# Altium PCB eggubator.PcbDoc (part 2 of 2)
Units mil, origin at the board's own origin, x right, y up, seen from the top; angles counter-clockwise.
Board outline 5983.25 x 3976.38 mil, 2 copper layers (Top Layer, Bottom Layer); 80 components, 96 nets, 327 pads, 68 vias.
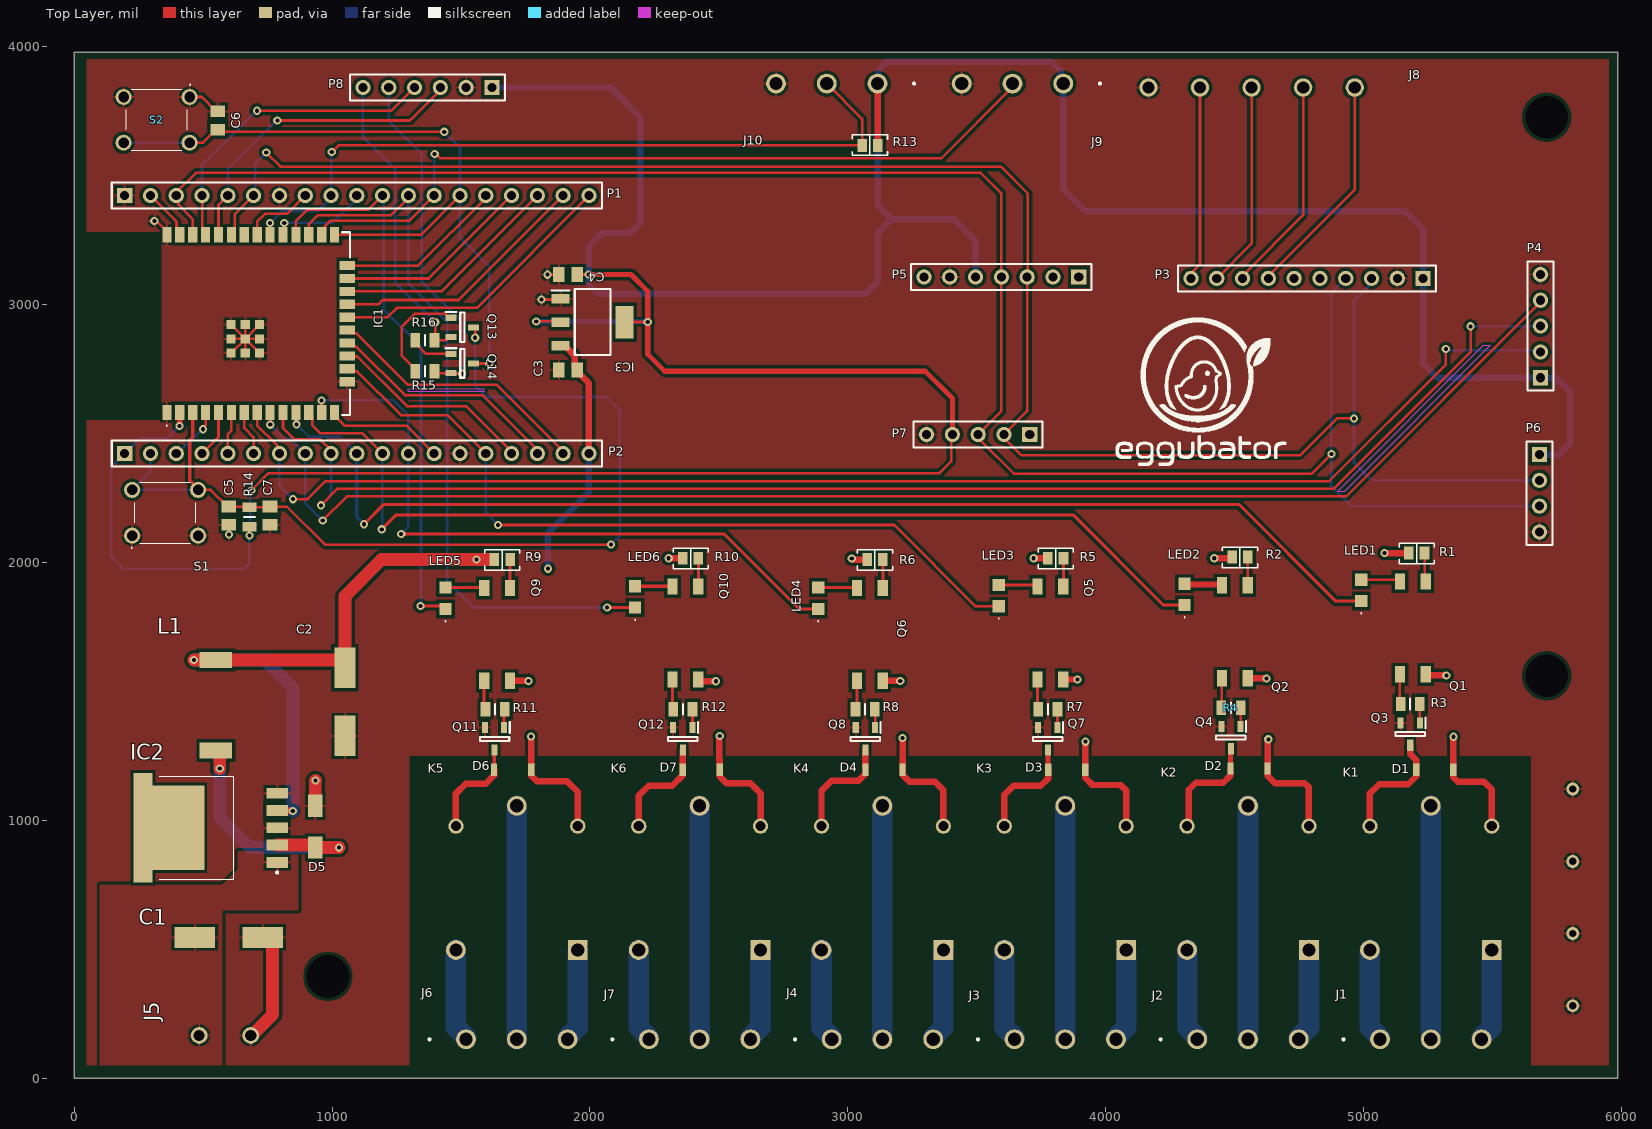
[diagram p0: Top Layer view]

## Part data (continued)
R14 R15 R16: library part RC0805FR-0710KL, "Res General Purpose Thick Film 0805 10k Ohm 1% 1/8W ±100ppm/°C Ceramic Paper T/R", Case Code (Imperial)=0805, Manufacturer="Yageo Group", Max Operating Temperature=155°C, Max Power Dissipation=125mW, Min Operating Temperature=-55°C, Mouser Part Number=603-RC0805FR-0710KL, Temperature Coefficient=100ppm/°C, Tolerance=1%, Voltage Rating=150V, Arrow Part Number=RC0805FR-0710KL, Arrow Price/Stock=https://www.arrow.com/en/products/rc0805fr0710kl/yageo.html?utm_currency=USD&region=europe, Case/Package=0805, Category="Chip SMD Resistors", China RoHS=Non-Compliant, ComponentLink1Description=https://datasheet.octopart.com:443/RC0805FR-0710KL-Yageo-datasheet-175887523.pdf?src-supplier=Newark, ComponentLink1URL=https://datasheet.octopart.com:443/RC0805FR-0710KL-Yageo-datasheet-175887523.pdf?src-supplier=Newark, ComponentLink2Description=https://datasheet.octopart.com:443/RC0805FR-0710KL-Yageo-datasheet-62067350.pdf?src-supplier=Farnell, ComponentLink2URL=https://datasheet.octopart.com:443/RC0805FR-0710KL-Yageo-datasheet-62067350.pdf?src-supplier=Farnell, ComponentLink3Description=https://datasheet.octopart.com:443/RC0805FR-0710KL-Yageo-datasheet-13691069.pdf?src-supplier=Farnell, ComponentLink3URL=https://datasheet.octopart.com:443/RC0805FR-0710KL-Yageo-datasheet-13691069.pdf?src-supplier=Farnell, ComponentLink4Description=https://datasheet.octopart.com:443/RC0805FR-0710KL-Yageo-datasheet-103092701.pdf?src-supplier=Upverter, ComponentLink4URL=https://datasheet.octopart.com:443/RC0805FR-0710KL-Yageo-datasheet-103092701.pdf?src-supplier=Upverter, ComponentLink5Description=https://datasheet.octopart.com:443/RC0805FR-0710KL-Yageo-datasheet-98239111.pdf?src-supplier=Upverter, ComponentLink5URL=https://datasheet.octopart.com:443/RC0805FR-0710KL-Yageo-datasheet-98239111.pdf?src-supplier=Upverter, ComponentLink6Description=https://datasheet.octopart.com:443/RC0805FR-0710KL-Yageo---Phycomp-datasheet-67302840.pdf?src-supplier=Upverter, ComponentLink6URL=https://datasheet.octopart.com:443/RC0805FR-0710KL-Yageo---Phycomp-datasheet-67302840.pdf?src-supplier=Upverter, ComponentLink7Description=https://datasheet.octopart.com:443/RC0805FR-0710KL-Yageo-datasheet-8330313.pdf?src-supplier=element14+APAC, ComponentLink7URL=https://datasheet.octopart.com:443/RC0805FR-0710KL-Yageo-datasheet-8330313.pdf?src-supplier=element14+APAC, ComponentLink8Description=https://datasheet.octopart.com:443/RC0805FR-0710KL-Yageo-datasheet-12592811.pdf?src-supplier=element14+APAC, ComponentLink8URL=https://datasheet.octopart.com:443/RC0805FR-0710KL-Yageo-datasheet-12592811.pdf?src-supplier=element14+APAC, ComponentLink9Description=https://datasheet.octopart.com:443/RC0805FR-0710KL-Yageo-Group-datasheet-190305687.pdf?src-supplier=Future+Electronics, ComponentLink9URL=https://datasheet.octopart.com:443/RC0805FR-0710KL-Yageo-Group-datasheet-190305687.pdf?src-supplier=Future+Electronics, ComponentLink10Description=https://datasheet.octopart.com:443/RC0805FR-0710KL-Yageo-datasheet-164759695.pdf?src-supplier=Future+Electronics, ComponentLink10URL=https://datasheet.octopart.com:443/RC0805FR-0710KL-Yageo-datasheet-164759695.pdf?src-supplier=Future+Electronics, ComponentLink11Description=https://datasheet.octopart.com:443/RC0805FR-0710KL-Yageo-datasheet-15800360.pdf?src-supplier=Future+Electronics, ComponentLink11URL=https://datasheet.octopart.com:443/RC0805FR-0710KL-Yageo-datasheet-15800360.pdf?src-supplier=Future+Electronics, ComponentLink12Description=https://datasheet.octopart.com:443/RC0805FR-0710KL-Yageo-datasheet-8324252.pdf?src-supplier=Future+Electronics, ComponentLink12URL=https://datasheet.octopart.com:443/RC0805FR-0710KL-Yageo-datasheet-8324252.pdf?src-supplier=Future+Electronics, ComponentLink13Description=https://datasheet.octopart.com:443/RC0805FR-0710KL-Yageo-datasheet-79472498.pdf?src-supplier=Megastar, ComponentLink13URL=https://datasheet.octopart.com:443/RC0805FR-0710KL-Yageo-datasheet-79472498.pdf?src-supplier=Megastar, ComponentLink14Description=https://datasheet.octopart.com:443/RC0805FR-0710KL-Yageo-datasheet-27714392.pdf?src-supplier=Seeed+Studio, ComponentLink14URL=https://datasheet.octopart.com:443/RC0805FR-0710KL-Yageo-datasheet-27714392.pdf?src-supplier=Seeed+Studio, ComponentLink15Description=https://datasheet.octopart.com/RC0805FR-0710KL-Yageo-datasheet-73766026.pdf, ComponentLink15URL=https://datasheet.octopart.com/RC0805FR-0710KL-Yageo-datasheet-73766026.pdf, ComponentLink16Description=https://datasheet.octopart.com:443/RC0805FR-0710KL-Yageo-datasheet-118657.pdf?src-supplier=DigiKey, ComponentLink16URL=https://datasheet.octopart.com:443/RC0805FR-0710KL-Yageo-datasheet-118657.pdf?src-supplier=DigiKey, ComponentLink17Description=https://datasheet.octopart.com:443/RC0805FR-0710KL-Yageo-datasheet-502840.pdf?src-supplier=element14, ComponentLink17URL=https://datasheet.octopart.com:443/RC0805FR-0710KL-Yageo-datasheet-502840.pdf?src-supplier=element14, ComponentLink18Description=http://sigma.octopart.com:80/conflict_mineral_statement/Yageo-company-3.pdf?src-supplier=Compliance+Statements, ComponentLink18URL=http://sigma.octopart.com:80/conflict_mineral_statement/Yageo-company-3.pdf?src-supplier=Compliance+Statements, ComponentLink19Description=http://sigma.octopart.com:80/rohs_statement/Yageo-company-2.pdf?src-supplier=Compliance+Statements, ComponentLink19URL=http://sigma.octopart.com:80/rohs_statement/Yageo-company-2.pdf?src-supplier=Compliance+Statements, Composition="Thick Film", Contact Plating=Tin, Country of Origin="Mainland China, Taiwan", Datasheet Link=https://www.yageo.com/upload/media/product/productsearch/datasheet/rchip/PYu-RC_Group_51_RoHS_L_11.pdf, Depth=1.25mm, Export Control Classification Number (ECCN) Code=EAR99, Features="Moisture Resistant", Harmonized Tariff Schedule (HTS) Code=8533.21.00.30, Height=0.6mm, Introduction Date=2004-09-22, Lead Free="Lead Free", Length=2mm, Lifecycle Status=Production, Manufacturer Part Number=RC0805FR-0710KL, Manufacturer_Name="Yageo Group", Manufacturer_Part_Number=RC0805FR-0710KL, Military Standard=Not, Mount="Surface Mount", Mouser Price/Stock=https://www.mouser.co.uk/ProductDetail/YAGEO/RC0805FR-0710KL?qs=7bY8808IzHq6vrU3BeiiYw%3D%3D, Number of Pins=2, Number of Terminals=2, Number of Terminations=2, Packaging="Tape and Reel", Power Rating=125mW, Pricing 1="5000=0.0068, 20000=0.0066, 75000=0.0064, 150000=0.0063, 375000=0.006 (USD)", Radiation Hardening=No, REACH SVHC=Yes, Resistance=10kΩ, RoHS=Compliant, Schedule B="8533210045, 8533210045|8533210045|8533210045|8533210045|8533210045|8533210045|8533210045|8533210045|8533210045|8533210045|8533210045|8533210045|8533210045|8533210045|8533210045|8533210045|8533210045|8533210045|8533210045|8533210045|8533210045|8533210045|8533210045|85", Stock 1=10960000, Supplier 1="Future Electronics", Supplier Part Number 1=RC0805FR-0710KL, Termination=SMD/SMT, Voltage Rating (AC)=150V, Voltage Rating (DC)=150V, Width=1.25mm, Working Voltage=150V
S1 S2: "Switch", Manufacturer_Name=E-Switch, Mouser Part Number=612-TL1105A, Datasheet Link=https://configured-product-images.s3.amazonaws.com/2D/specs/TL1105CF250Q.pdf, Height=6.8mm, Manufacturer_Part_Number=TL1105AF160Q, Mouser Price/Stock=https://www.mouser.co.uk/ProductDetail/E-Switch/TL1105AF160Q?qs=YXf4ACKMM4wdc4witUH7eQ%3D%3D

## Free pads (board coordinates)
  round 0 hole 165.35: 2(984.25,393.7) 2(5708.66,1559.06) 2(5708.66,3724.41)

## Via types
v1: diameter 32, hole 16, Top Layer to Bottom Layer, 64 vias
v2: diameter 50, hole 28, Top Layer to Bottom Layer, 4 vias

## Nets (pads, with @x,y where several pads share a name; then routed paths per layer and width w, separated by ;. In a path a pad name is that pad's centre, name@x,y a point inside that pad or via, vN(x,y) a via of type N, cw(c..) or ccw(c..) an arc to the next point about the centre after c; other vN are vias at no path point)
A0: J8.1 P3.7 | length 878.8
  Top Layer w10: P3.7 4630,3110 4965,3445 J8.1
A1: J8.2 P3.8 | length 837.3
  Top Layer w10: P3.8 4530,3110 4765,3345 J8.2
A2: J8.3 P3.9 | length 795.9
  Top Layer w10: P3.9 4565,3235 J8.3
A3: J8.4 P3.10 | length 754.5
  Top Layer w10: P3.10 4339.39,3109.39 4339.39,3129.39 4365,3155 J8.4
BTN_DOWN: IC1.9 P2.8 P4.4 | length 5614.2
  Top Layer w10: v1(760.38,2532.94) 760,2533.32 IC1.9 IC1.9@765.61,2574.39 ; P2.8@886.08,2420.87 P2.8 ; v1(964,2161) 1058,2255 4932,2255 5685,3008 P4.4
  Bottom Layer w10: v1(760.38,2532.94) 815.31,2478.01 838.96,2478.01 P2.8 896.1,2228.9 v1(964,2161)
BTN_OK: IC1.10 P2.9 P4.3 | length 5588
  Top Layer w10: IC1.10 810,2520 854,2476 954,2476 996.1,2433.9 P2.9 ; v1(957,2220) 1022,2285 4883.67,2285 5414,2815.33 v1(5414,2914)
  Bottom Layer w10: v1(957,2220) 996.1,2259.1 P2.9 ; v1(5414,2914) 5415,2915 P4.3@5660,2915 ; P4.3@5660,2909 5679,2909 P4.3
BTN_UP: IC1.8 P2.7 P4.2 | length 5510.4
  Top Layer w10: IC1.8 710,2530 786.72,2453.28 786.72,2430.25 P2.7 ; v1(849,2244) 904.98,2244 974.98,2314 4866,2314 5318,2766 v1(5318,2826)
  Bottom Layer w10: P2.7 796.1,2296.9 v1(849,2244) ; v1(5318,2826) 5322.21,2821.79 5678.21,2821.79 P4.2
CLK: IC1.20 P1.19 | length 1132.1
  Top Layer w10: IC1.20 1215.49,2949.49 1252,2986 1561.24,2986 P1.19
CMD: IC1.19 P2.18 | length 1040.4
  Top Layer w10: IC1.19 1071.79,2886.91 1095.09,2886.91 1295,2687 1639,2687 1896.1,2429.9 P2.18
DHT_PIN: IC1.26 J9.2 P1.13 | length 3048.7
  Top Layer w10: IC1.26 972.72,3281.69 972.72,3302.98 992.74,3323 1298.24,3323 P1.13 ; v1(1398,3582) 1403.95,3582 1420.95,3565 3361.85,3565 3638.15,3841.3 J9.2
  Bottom Layer w10: P1.13 1397.05,3421.81 1397.05,3581.05 v1(1398,3582)
DS18B20_PIN: IC1.30 J10.2 P1.9 R13.1 | length 2865.3
  Top Layer w10: IC1.30 v1(760,3315) ; v1(999,3590) 1025,3616 3054,3616 R13.1 3055,3718.15 J10.2
  Bottom Layer w10: v1(760,3315) 804.4,3359.4 944.4,3359.4 996.1,3411.1 996.1,3415.1 P1.9 ; P1.9@995.05,3421.92 997.55,3424.42 997.55,3588.55 v1(999,3590)
DTR: P8.5 Q14.2 R15.2 | length 1338.4
  Top Layer w10: R15.2 1404.8,2732.6 Q14.2 1462.99,2731.3 1502.7,2731.3 v1(1504,2730)
  Bottom Layer w10: P8.5 1220,3710 1348.35,3581.65 1348.35,3086.65 1504,2931 v1(1504,2730)
EN: C5.1 C7.1 IC1.3 P2.2 Q13.3 R14.1 S1.3 S1.4 | length 3798.6
  Top Layer w10: S1.4 529.53,2280 594.09,2215.43 C5.1 676.97,2215.43 R14.1 756.97,2212.4 C7.1 824.57,2215.43 972,2068 v1(2082,2068) ; Q13.3 1555,2903.31 v1(1555,2870)
  Top Layer w12: IC1.3 460,2484.54 448.57,2473.11 448.57,2316.97 480.91,2284.64 S1.4
  Bottom Layer w10: P2.2 296.1,2351.1 S1.3 S1.4 ; v1(1555,2870) 1555,2685 1600,2640 2065,2640 2115,2590 2115,2101 v1(2082,2068)
GND: C1.2 C2.2 C3.1 C4.1 C5.2 C6.2 C7.2 D5.2 IC1.1 IC1.15 IC1.38 IC1.39 IC1.40 IC1.41 IC1.42 IC1.43 IC1.44 IC1.45 IC1.46 IC1.47 IC2.3 IC2.5 IC3.1 J5.1 J8.5 J9.3 J10.3 P1.1 P1.7 P2.14 P3.2 P4.5 P5.6 P6.4 P7.5 P8.2 Q3.2 Q4.2 Q7.2 Q8.2 Q11.2 Q12.2 S1.1 S1.2 S2.1 S2.2 | length 1456.6
  Top Layer w10: v1(311.19,3321.96) 315.4,3317.76 323.03,3317.76 360,3280.79 IC1.38 ; S2.1 495.36,3803.17 551.09,3747.43 C6.2 ; C5.2 601,2143.57 v1(601,2107) ; IC1.39 IC1.47 ; IC1.46 IC1.47 ; IC1.45 IC1.47 ; IC1.40 IC1.47 ; IC1.44 IC1.47 ; IC1.41 IC1.47 ; IC1.42 IC1.47 ; IC1.43 IC1.47 ; IC1.15 IC1.15@1071.02,2699.49 ; v1(1812,3018) 1883.43,3018 IC3.1 ; v1(1835.22,3114.43) 1878.99,3114.43 C4.1
  Top Layer w50: J5.1 689.05,165 770,245.95 770,529.65 754.65,545 C1.2 ; D5.2 935,1152 v1(936,1153)
  other v2: 5810,280 5810,560 5810,840 5810,1120
I2C_SCL: IC1.33 P1.6 P3.3 P5.3 P6.2 P7.2 | length 7335.2
  Top Layer w10: IC1.33 610,3285 615,3290 619.21,3290 622.72,3293.5 622.72,3347.48 P1.6 ; v1(745,3588) 800,3533 3593,3533 3698,3428 3698,3108 P5.3 3695,2585 P7.2 3605,2482 3673,2414 4753,2414 4896,2557 v1(4962,2557)
  Bottom Layer w10: P1.6 682.13,3420.87 682,3421 702,3441 702,3545 v1(745,3588) ; P3.3 5020.61,3090.61 5020.61,3071.61 4962,3013 4962,2386 5031,2317 P6.2
I2C_SDA: IC1.36 P1.3 P3.4 P5.4 P6.3 P7.3 | length 7568
  Top Layer w10: IC1.36 460,3329.83 404.02,3385.81 404.02,3412.95 P1.3 396.1,3432.1 473,3509 3515,3509 3595,3429 P5.4 3595,2585 P7.3 3505,2481.73 3519.49,2467.24 3519.49,2466.51 3643,2343 4799,2343 v1(4875,2419)
  Bottom Layer w10: P3.4 4873,3043 4873,2421 v1(4875,2419) 4873,2417 4873,2295 4951,2217 P6.3
IO0: C6.1 IC1.25 P1.14 Q14.3 S2.3 S2.4 | length 2849.5
  Top Layer w10: S2.3 500.53,3626 551.09,3676.57 C6.1 565.57,3668 v1(1435,3668) ; IC1.25 1344.21,3268.98 P1.14 ; Q14.3 v1(1610,2770)
  Bottom Layer w10: S2.4 S2.3 ; v1(1435,3668) 1496.1,3606.9 P1.14 1495,3419.76 1495,3260 1610,3145 v1(1610,2770)
IO2: IC1.24 P1.15 | length 654.4
  Top Layer w10: IC1.24 1333.49,3149.49 1596.1,3412.1 P1.15
IO5: IC1.29 P1.10 | length 379.4
  Top Layer w10: IC1.29 815,3273.98 v1(815,3315)
  Bottom Layer w10: v1(815,3315) 1001,3315 1096.1,3410.1 P1.10
IO12: IC1.14 P2.13 | length 458.9
  Top Layer w10: IC1.14 1010,2568.19 1049.19,2529 1287.97,2529 P2.13
IO13: IC1.16 LED3.1 P2.15 | length 3041.3
  Top Layer w10: IC1.16 1069.29,2739.41 1097.59,2739.41 1267,2570 1446.97,2570 P2.15 ; v1(1644,2144) 3180,2144 3495.34,1828.66 LED3.1
  Bottom Layer w10: P2.15 1596.1,2191.9 v1(1644,2144)
IO14: IC1.13 LED4.1 P2.12 | length 2634.4
  Top Layer w10: v1(959.59,2627) 956.59,2630 950,2630 960,2620 IC1.13
  Top Layer w12: v1(1268,2109) 2520,2109 2810.34,1818.66 LED4.1
  Bottom Layer w10: v1(959.59,2627) 1238,2627 1296.1,2568.9 1296.1,2137.1 v1(1268,2109)
IO15: IC1.23 P1.16 | length 770
  Top Layer w10: IC1.23 1374.72,3099.49 P1.16
IO16: IC1.27 LED6.1 P1.12 | length 2805.9
  Top Layer w10: IC1.27 910,3310 945,3345 1229,3345 1296.1,3412.1 P1.12 ; v1(2066.63,1824.14) 2174.52,1824.14 LED6.1
  Bottom Layer w10: P1.12 1296.1,3080.9 1446,2931 1446,1927 1548.86,1824.14 v1(2066.63,1824.14)
IO17: IC1.28 LED5.1 P1.11 | length 2203.4
  Top Layer w10: IC1.28 860,3322 905,3367 1142.24,3367 P1.11 ; v1(1343,1830) 1428.66,1830 LED5.1
  Bottom Layer w10: P1.11 1196.1,3426.1 1200,3430 1200,3426.1 1200,3420.87 1200,2980 1345,2835 1345,1832 v1(1343,1830)
IO19: IC1.31 P1.8 | length 278.9
  Top Layer w10: IC1.31 710,3320 740,3350 825.24,3350 P1.8
IO23: IC1.37 P1.2 | length 199.1
  Top Layer w10: P1.2 397.28,3319.69 397.28,3281.69 IC1.37
IO26: IC1.11 LED1.1 P2.10 | length 4684.6
  Top Layer w10: v1(862,2534) 860,2536 IC1.11 IC1.11@872.72,2567.28
  Top Layer w12: v1(1124,2147) 1201,2224 4516,2224 4891.34,1848.66 LED1.1
  Bottom Layer w10: v1(862,2534) 910,2486 1030.97,2486 P2.10
  Bottom Layer w12: P2.10 1096.1,2174.9 v1(1124,2147)
IO27: IC1.12 LED2.1 P2.11 | length 3948.2
  Top Layer w10: IC1.12 922.72,2567.28 922.72,2531.28 955,2499 1117.97,2499 P2.11
  Top Layer w12: v1(1193,2127) 1249,2183 3873,2183 4222.34,1833.66 LED2.1
  Bottom Layer w10: v1(1193,2127) 1194.55,2128.55 1194.55,2419.31 P2.11
IO34: IC1.6 P2.5 | length 164.9
  Top Layer w10: P2.5 596.1,2496.1 610,2510 IC1.6
IO35: IC1.7 P2.6 | length 174.1
  Top Layer w10: IC1.7 660,2520 696.1,2483.9 P2.6
NC: IC1.32
NetD5_1: D5.1 IC2.2 L1.1 | length 1029.1
  Top Layer w50: L1.1 558.5,1269.8 565,1263.31 v1(565,1200) ; IC2.2 931.46,903.07 935,899.53 D5.1 935.58,893 v1(1027.32,893)
  Bottom Layer w50: v1(565,1200) 565,1010 682,893 v1(1027.32,893)
NetLED1_2: LED1.2 Q1.2 | length 152.5
  Top Layer w10: LED1.2 5133.9,1931.34 Q1.2
NetLED2_2: LED2.2 Q2.2 | length 147.6
  Top Layer w25: LED2.2 4308.11,1913.23 4446.89,1913.23 Q2.2
NetLED3_2: LED3.2 Q5.2 | length 152.6
  Top Layer w12: LED3.2 3728.78,1911.34 Q5.2
NetLED4_2: LED4.2 Q6.2 | length 150.5
  Top Layer w12: LED4.2 3033.78,1901.34 Q6.2
NetLED5_2: LED5.2 Q9.2 | length 150.5
  Top Layer w12: LED5.2 1588.78,1901.34 Q9.2
NetLED6_2: LED6.2 Q10.2 | length 145.5
  Top Layer w12: LED6.2 2318.9,1906.34 Q10.2
NetQ1_1: Q1.1 R1.1 | length 111.6
  Top Layer w10: R1.1 5235.51,1929.72 Q1.1
NetQ1_3: Q1.3 R3.2 | length 116.1
  Top Layer w10: Q1.3 5140,1452.6 R3.2
NetQ2_1: Q2.1 R2.1 | length 110.1
  Top Layer w10: Q2.1 4550.51,1910.63 R2.1
NetQ2_3: Q2.3 R4.2 | length 115.9
  Top Layer w10: R4.2 4450,1437.4 Q2.3
NetQ3_1: Q3.1 R3.1 | length 73.4
  Top Layer w10: Q3.1 R3.1
NetQ4_1: Q4.1 R4.1 | length 71.7
  Top Layer w10: Q4.1 R4.1
NetQ5_1: Q5.1 R5.1 | length 110.3
  Top Layer w12: Q5.1 3836.02,1906.14 R5.1
NetQ5_3: Q5.3 R7.2 | length 116
  Top Layer w12: Q5.3 3735,1432.6 R7.2
NetQ6_1: Q6.1 R6.1 | length 110.1
  Top Layer w12: Q6.1 3135.51,1900.63 R6.1
NetQ6_3: Q6.3 R8.2 | length 115.8
  Top Layer w12: R8.2 3035,1435.4 Q6.3 Q6.3@3037.6,1537.28
NetQ7_1: Q7.1 R7.1 | length 71.7
  Top Layer w12: Q7.1 R7.1
NetQ8_1: Q8.1 R8.1 | length 72.1
  Top Layer w10: R8.1 3105.4,1429 Q8.1
NetQ9_1: Q9.1 R9.1 | length 110.1
  Top Layer w12: Q9.1 1690.51,1900.63 R9.1
NetQ9_3: Q9.3 R11.2 | length 112
  Top Layer w12: Q9.3 1590,1435 R11.2
NetQ10_1: Q10.1 R10.1 | length 110
  Top Layer w12: Q10.1 2420.51,1905.75 R10.1
NetQ10_3: Q10.3 R12.2 | length 116.1
  Top Layer w12: Q10.3 2320,1432.6 R12.2
NetQ11_1: Q11.1 R11.1 | length 72.7
  Top Layer w12: Q11.1 1667.4,1427.6 R11.1
NetQ12_1: Q12.1 R12.1 | length 71.7
  Top Layer w12: Q12.1 R12.1
NetQ13_1: Q13.1 R15.1 | length 413.2
  Top Layer w10: R15.1 1322.6,2748.86 1270,2801.46 1270,2911.54 1321.46,2963 1437,2963 1445.04,2954.96 1445.04,2954.21 1451.85,2947.4 Q13.1
NetQ14_1: Q14.1 R16.1 | length 167.1
  Top Layer w10: R16.1 1336.3,2846.3 1336.3,2835.7 1364.6,2807.4 Q14.1
R1_C: D1.2 K1.4 Q3.3 | length 463.2
  Top Layer w25: K1.4 5023.62,1102.62 5060,1139 5172,1139 5203.15,1170.15 5203.15,1232.62 5180,1255.77 Q3.3
R1_COM: J1.2 K1.3 | length 905.1
  Bottom Layer w80: J1.2 K1.3
R1_NC: J1.3 K1.1 | length 362.4
  Top Layer w50: J1.3 J1.3@5456.69,157.24
  Bottom Layer w80: J1.3@5456.69,157.24 5496.06,196.61 K1.1
R1_NO: J1.1 K1.5 | length 362.4
  Top Layer w50: J1.1 J1.1@5062.99,157.24
  Bottom Layer w80: K1.5 5023.62,196.61 J1.1@5062.99,157.24
R2_C: D2.2 K2.4 Q4.3 | length 432.8
  Top Layer w20: D2.2 4483.15,1254.02 4483.19,1254.06 4483.19,1274.88 Q4.3
  Top Layer w25: K2.4 4321.48,982.89 4321.48,1117.48 4349,1145 4455,1145 4483.15,1173.15 D2.2
R2_COM: J2.2 K2.3 | length 905.1
  Bottom Layer w80: J2.2 K2.3
R2_NC: J2.3 K2.1 | length 362.4
  Top Layer w50: J2.3 J2.3@4748.03,157.24
  Bottom Layer w80: J2.3@4748.03,157.24 4787.4,196.61 K2.1
R2_NO: J2.1 K2.5 | length 362.4
  Top Layer w50: J2.1 J2.1@4354.33,157.24
  Bottom Layer w80: K2.5 4314.96,196.61 J2.1@4354.33,157.24
R3_C: D4.2 K4.4 Q8.3 | length 427.5
  Top Layer w25: K4.4 2897.64,1113.64 2937,1153 3042,1153 3068.15,1179.15 3068.15,1206.42 3068,1206.57 Q8.3
R3_COM: J4.2 K4.3 | length 905.1
  Bottom Layer w80: J4.2 K4.3
R3_NC: J4.3 K4.1 | length 362.4
  Top Layer w50: J4.3 J4.3@3330.71,157.24
  Bottom Layer w80: J4.3@3330.71,157.24 3370.08,196.61 K4.1
R3_NO: J4.1 K4.5 | length 362.4
  Top Layer w50: J4.1 J4.1@2937.01,157.24
  Bottom Layer w80: K4.5 2897.64,196.61 J4.1@2937.01,157.24
R4_C: D3.2 K3.4 Q7.3 | length 429.8
  Top Layer w20: Q7.3 3775.57,1271.12 3775.57,1199.23 3773.75,1197.4 D3.2
  Top Layer w25: K3.4 3606.3,1097.3 3642,1133 3748,1133 3776.15,1161.15 D3.2
R4_COM: J3.2 K3.3 | length 905.1
  Bottom Layer w80: J3.2 K3.3
R4_NC: J3.3 K3.1 | length 362.4
  Top Layer w50: J3.3 J3.3@4039.37,157.24
  Bottom Layer w80: J3.3@4039.37,157.24 4078.74,196.61 K3.1
R4_NO: J3.1 K3.5 | length 362.4
  Top Layer w50: J3.1 J3.1@3645.67,157.24
  Bottom Layer w80: K3.5 3606.3,196.61 J3.1@3645.67,157.24
R5_C: D6.2 K5.4 Q11.3 | length 402.7
  Top Layer w12: D6.2 1629.07,1195.93 1629.07,1270.77 Q11.3
  Top Layer w25: K5.4 1480.32,1103.32 1518,1141 1595.5,1141 1628.15,1173.64 D6.2
R5_COM: J6.2 K5.3 | length 905.1
  Bottom Layer w80: J6.2 K5.3
R5_NC: J6.3 K5.1 | length 362.4
  Top Layer w50: J6.3 J6.3@1913.39,157.24
  Bottom Layer w80: J6.3@1913.39,157.24 1952.76,196.61 K5.1
R5_NO: J6.1 K5.5 | length 362.4
  Top Layer w50: J6.1 J6.1@1519.68,157.24
  Bottom Layer w80: K5.5 1480.32,196.61 J6.1@1519.68,157.24
R6_C: D7.2 K6.4 Q12.3 | length 420
  Top Layer w25: K6.4 2188.98,1094.98 2227.49,1133.49 2319.49,1133.49 2359.05,1173.05 2359.05,1194.9 D7.2 2359.15,1206.42 2360,1207.27 Q12.3
R6_COM: J7.2 K6.3 | length 905.1
  Bottom Layer w80: J7.2 K6.3
R6_NC: J7.3 K6.1 | length 362.4
  Top Layer w50: J7.3 J7.3@2622.05,157.24
  Bottom Layer w80: J7.3@2622.05,157.24 2661.42,196.61 K6.1
R6_NO: J7.1 K6.5 | length 362.4
  Top Layer w50: J7.1 J7.1@2228.35,157.24
  Bottom Layer w80: K6.5 2188.98,196.61 J7.1@2228.35,157.24
RTS: P8.6 Q13.2 R16.2 | length 1169.6
  Top Layer w10: v1(1400,2930) 1400,2862.6 R16.2 1439.25,2860 1451.85,2872.6 Q13.2
  Bottom Layer w10: P8.6 1120,3648.11 1245,3523.11 1245,3084.53 1389,2940.53 1389,2935.86 1391.93,2932.93 1394.86,2930 v1(1400,2930)
RXD0: IC1.34 P1.5 P8.3 | length 1230.1
  Top Layer w10: IC1.34 560,3384.76 P1.5 ; v1(788,3712) 1302,3712 1420,3830 P8.3
  Bottom Layer w10: P1.5 596.1,3523.1 785,3712 v1(788,3712)
SD0: IC1.21 P1.18 | length 1011.4
  Top Layer w10: IC1.21 1179.49,2999.49 1196,3016 1491.24,3016 P1.18
SD1: IC1.22 P1.17 | length 890.7
  Top Layer w10: IC1.22 1424.72,3049.49 P1.17
SD2: IC1.17 P2.16 | length 798.4
  Top Layer w10: IC1.17 1061.58,2797.12 1097.88,2797.12 1290,2605 1520,2605 1696.1,2428.9 P2.16
SD3: IC1.18 P2.17 | length 922.7
  Top Layer w10: IC1.18 1071.93,2836.77 1093.23,2836.77 1283,2647 1584,2647 1781.63,2449.37 1781.63,2448.61 1796.1,2434.14 P2.17
SENSOR_VN: IC1.5 P2.4 | length 185.6
  Top Layer w10: P2.4 560,2484.76 IC1.5
SENSOR_VP: IC1.4 P2.3 | length 212
  Top Layer w10: v1(500,2515) 500,2520.95 510,2530.95 IC1.4
  Bottom Layer w10: P2.3 400.98,2420.87 495.12,2515 v1(500,2515)
TXD0: IC1.35 P1.4 P8.4 | length 1224.4
  Top Layer w10: P1.4 497.28,3419.69 497.28,3281.69 IC1.35 ; v1(709,3750) 1230,3750 P8.4
  Bottom Layer w10: P1.4 496.1,3539.1 707,3750 v1(709,3750)
VBAT: P5.7
VCC_3.3V: C4.2 IC1.2 IC3.2 IC3.4 J9.1 J10.1 P2.1 P3.1 P4.1 P5.5 P6.1 P7.4 P8.1 R13.2 R14.2 | length 15314.6
  Top Layer w10: v1(687,2278) 754,2345 3355,2345 3400,2390 3400,2490 P7.4 ; v1(1792,2933) 1882.98,2933 IC3.2 ; C4.2 v1(1995,3115) ; IC3.4 2135.02,2931 v1(2224,2931)
  Top Layer w20: v1(408.79,2528.09) 410,2529.3 IC1.2 ; v1(1995,3115) 2159,3115 2224,3050 v1(2224,2931) 2224,2806 2290,2740 3300,2740 3405,2635 P7.4
  Top Layer w25: J10.1 3115.51,3854.49 3115.51,3615.51 R13.2
  Bottom Layer w10: v1(408.79,2528.09) 360.7,2480 255.24,2480 P2.1 145,2369.76 145,2020 190,1975 660,1975 680,1995 v1(680,2103) 683.5,2106.5 683.5,2274.5 v1(687,2278)
  Bottom Layer w20: v1(1792,2933) 1793,2932 2223,2932 v1(2224,2931)
  Bottom Layer w25: P8.1 2080,3840 2195,3725 2195,3315 2155,3275 2045,3275 1995,3225 v1(1995,3115) 1995,3075 2030,3040 3070,3040 3115,3085 3115,3275 3170,3330 ; P5.5 3495,3245 3410,3330 3170,3330 ; P6.1 5757,2417 5800,2460 5800,2660 5745,2715 5285,2715 5230,2770 P3.1 5230,3290 5160,3360 3920,3360 3835,3445 J9.1 3825.09,3864.91 3825.09,3904.91 3790,3940 3150,3940 3118.66,3908.66 3118.66,3858.66 J10.1 3115,3385 3170,3330
VCC_5V: C2.1 C3.2 D1.1 D2.1 D3.1 D4.1 D6.1 D7.1 IC2.4 IC3.3 K1.2 K2.2 K3.2 K4.2 K5.2 K6.2 L1.2 P2.19 Q1.4 Q2.4 Q5.4 Q6.4 Q9.4 Q10.4 R1.2 R2.2 R5.2 R6.2 R9.2 R10.2 | length 7063.6
  Top Layer w25: IC2.4 846.5,1036.93 v1(848.04,1035.39) ; Q9.4@1694.67,1535.22 Q9.4 1761.29,1539.88 v1(1762.12,1539.04) ; v1(1771,1324) 1771.85,1323.15 1771.85,1173.64 1794.5,1151 1911,1151 1952.76,1109.24 K5.2 ; IC3.3 1901.73,2839.45 1940.3,2800.89 1940.3,2755.14 C3.2 1950.43,2739.09 1996.1,2693.43 P2.19 ; v1(2305,2015) R10.2 R10.2@2365.69,2021.2 ; Q10.4 2427,1538 v1(2488,1538) ; v1(2503,1326) 2502,1325 2502,1234 2502.75,1233.25 2502.75,1195.1 D7.1 2502.85,1169.15 2530,1142 2623,1142 2661.42,1103.58 K6.2 ; v1(3015,2014) 3016.89,2014 3020.89,2010 R6.2 ; Q6.4@3142.19,1532.7 Q6.4 3202.12,1539.88 v1(3203,1539) ; v1(3212,1318) 3211.85,1317.85 3211.85,1175.57 3238.42,1149 3338,1149 3370.08,1116.92 K4.2 ; v1(3720,2015) R5.2 ; Q5.4 3889.88,1544.88 v1(3890,1545) ; D3.1 3919.85,1164.15 3948,1136 4057,1136 4078.74,1114.26 K3.2 ; D3.1@3919.85,1206.52 3919.85,1302.85 v1(3921,1304) ; v1@4421.89,2015 4484.49,2015 R2.2 ; Q2.4 4622.12,1549.88 v1(4623,1549) ; D2.1@4626.85,1188.58 4626.85,1309.85 v1(4630,1313) ; D2.1 4626.85,1172.15 4656,1143 4771,1143 4787.4,1126.6 K2.2 ; v1(5080,2035) R1.2 ; Q1.4 5243.59,1561.41 5318.59,1561.41 v1(5320,1560) ; v1(5348,1323) 5346.85,1321.85 5346.85,1166.15 5364.06,1148.94 5466.06,1148.94 5496.06,1118.94 K1.2
  Top Layer w50: v1(464.45,1620.43) 549.77,1620.43 L1.2 1034.65,1620.2 1050,1604.84 C2.1 1050,1868 1192,2010 v1(1560,2010) 1610,2010
  Bottom Layer w25: v1(1837.72,1974.71) 1836.8,1975.63 1836.8,2111.8 1996.1,2271.1 P2.19
  Bottom Layer w50: v1(464.45,1620.43) 464.87,1620 740,1620 848.04,1511.96 v1(848.04,1035.39)
  other v1: 4420,2015
VIN: C1.1 IC2.1 J5.2 | length 68
  Top Layer w50: C1.1@425,529.65 440.35,545 C1.1 C1.1@455,558.11
pads on no net: IC2.T1 IC2.T2 P3.5 P3.6 P5.1 P5.2 P7.1

## Polygon pours and split planes (outlines as drawn)
GND on Top Layer "GND_L01_P004" (solid, remove dead copper, pour order 4): 50,50 50,2550 340,2550 340,3280 50,3280 50,3950 5950,3950 5950,50 5650,50 5650,1250 1300,1250 1300,50
VIN on Top Layer "VIN_L01_P000" (solid, remove dead copper, pour order 0): 575,50 100,50 100,750 575,750 635,810 635,880 870,880 870,650 580,650 575,650
GND on Bottom Layer "GND_L02_P006" (solid, remove dead copper, pour order 6): 50,50 50,2550 340,2550 340,3280 50,3280 50,3950 5950,3950 5950,60 5940,50 5650,50 5650,1250 1300,1250 1300,50
VCC_5V on Bottom Layer "VCC_5V_L02_P005" (solid, pour order 5): 1375.03,2122 5950,2122 5950,1250.26 1374.01,1258.28

## Keep-outs
Top Layer:
  rectangle: 1293.21,2663.01 1590.63,2669.67
  region: 4924.82,2272.33 4902.59,2272.33 4900.51,2274.4 4900.51,2277.33 5463.18,2840 5490,2840

## Silkscreen, mask and mechanical layers (free items; w line width, h text height)
Top Overlay:
  drawing of 15 lines, arcs and shapes, not listed
Board Outline:
  the board outline again, w10